# Altium PCB voltage.PcbDoc
Units mil, origin at the board's own origin, x right, y up, seen from the top; angles counter-clockwise.
Board outline 2497.45 x 842.52 mil, 2 copper layers (Top Layer, Bottom Layer); 37 components, 23 nets, 95 pads, 18 vias.
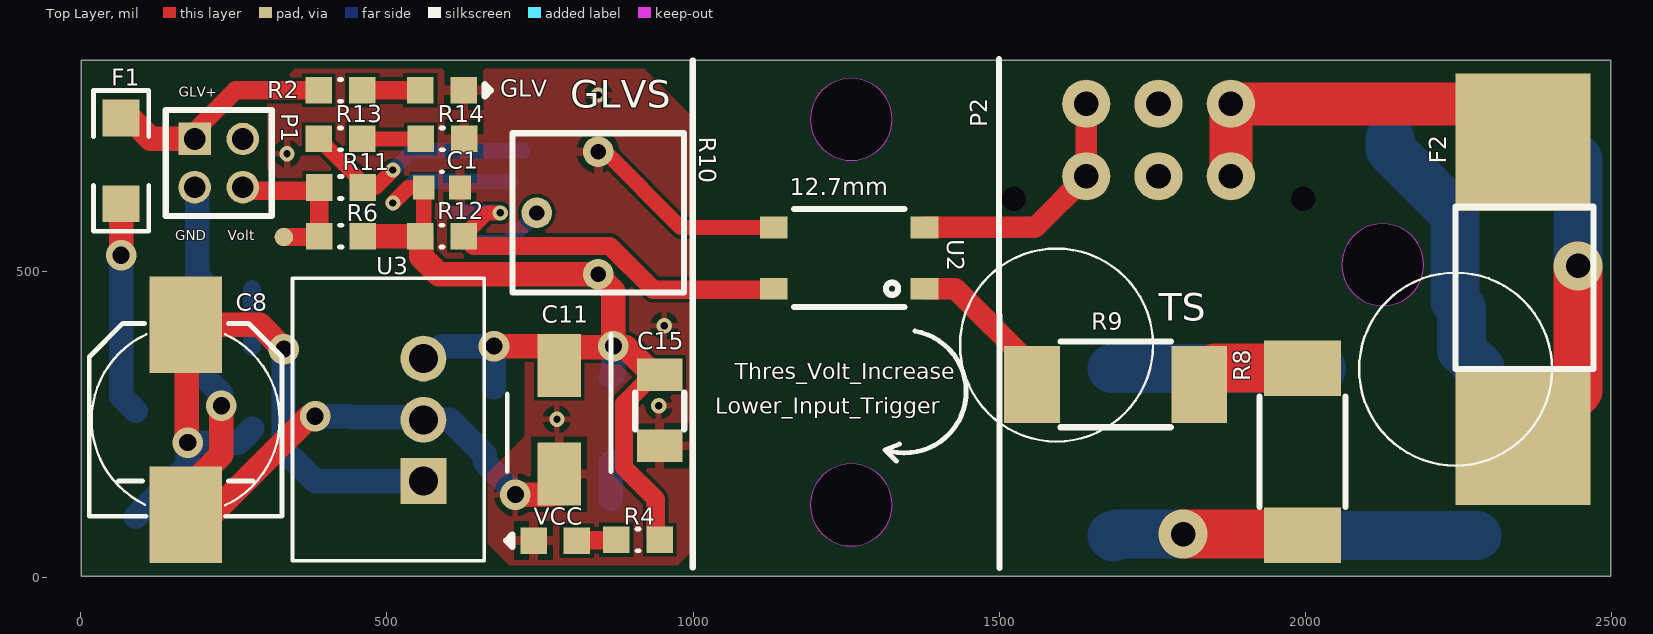
[diagram p0: Top Layer view]
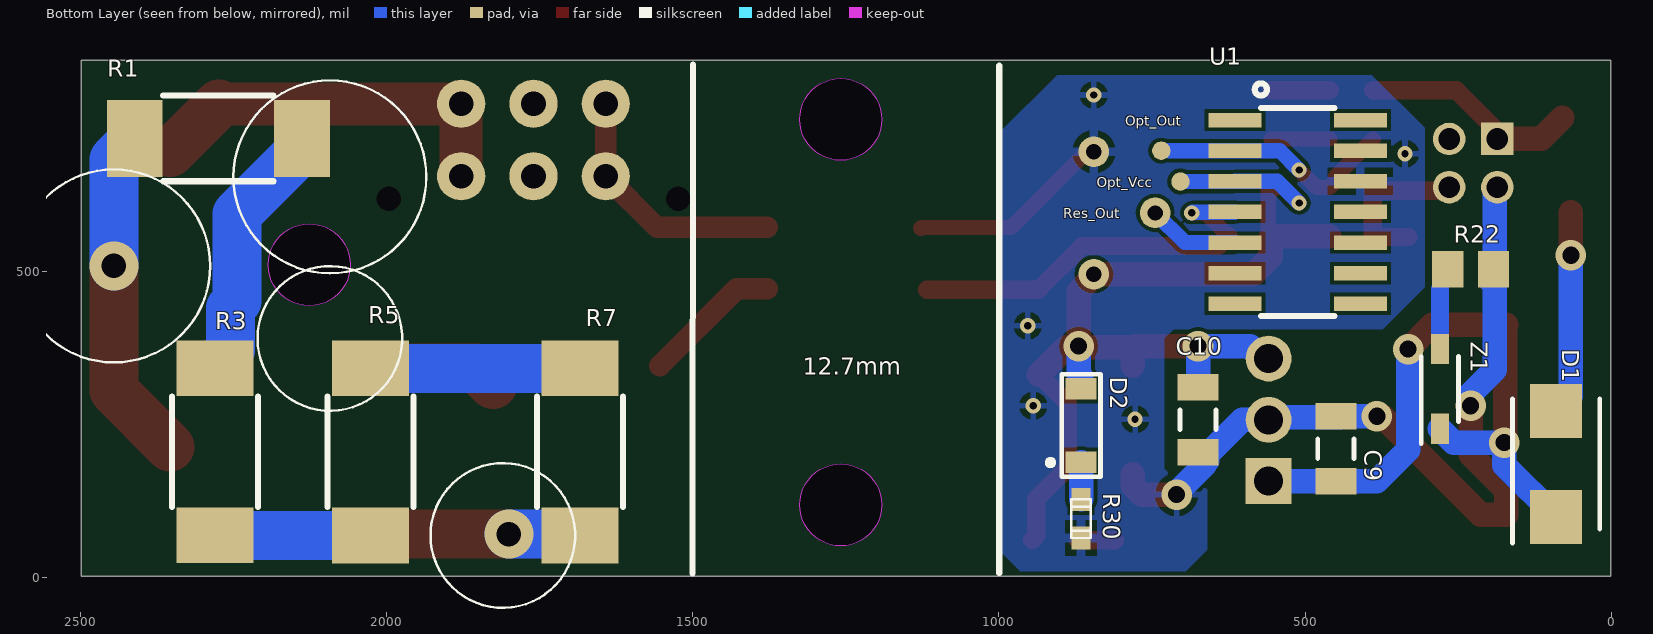
[diagram p1: Bottom Layer view, seen from below]
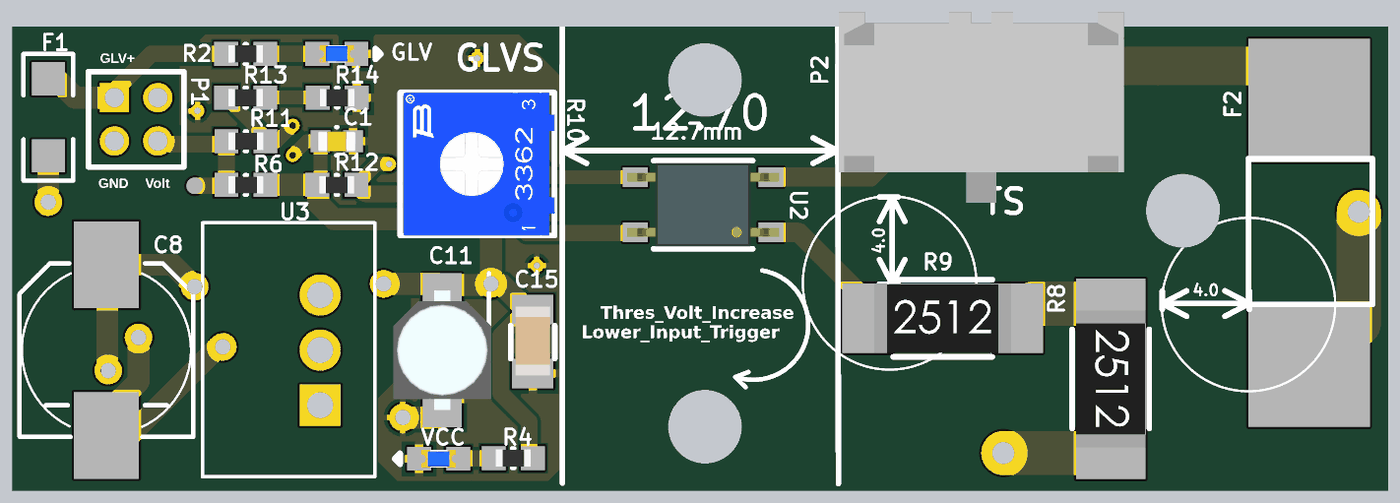
[diagram p2: 3D render of the assembled board from above, using the file's embedded part models]
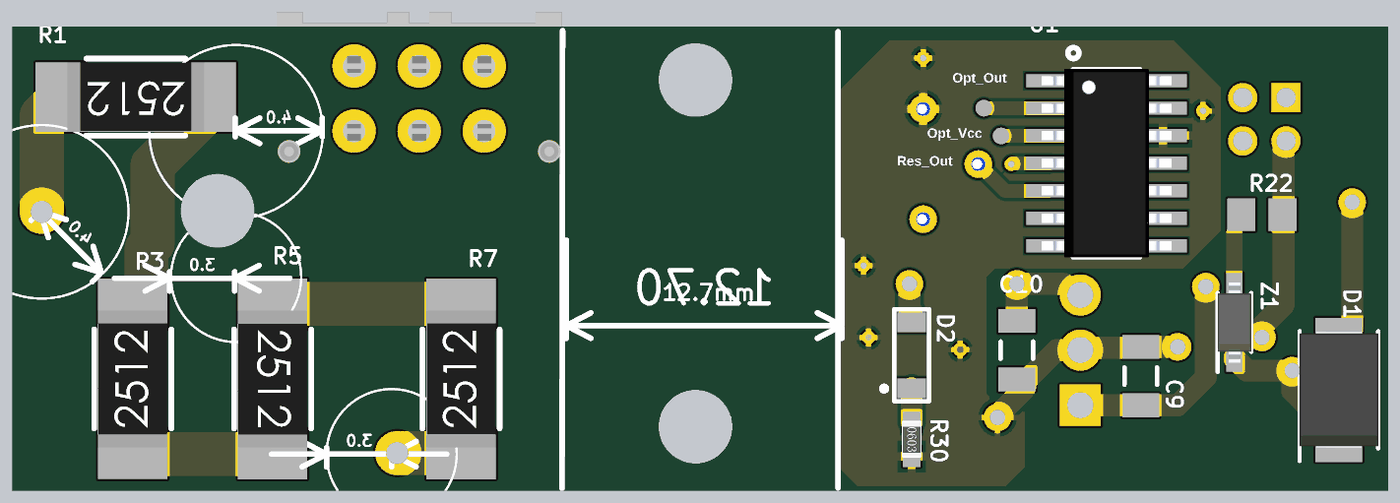
[diagram p3: 3D render of the assembled board from below, using the file's embedded part models]

## Layer stack, top to bottom
Top Solder: solder mask 0.4, Solder Resist, Dk 3.5
Top Layer: signal copper 1.4
Dielectric 1: dielectric 12.6, FR-4, Dk 4.8
Bottom Layer: signal copper 1.4
Bottom Solder: solder mask 0.4, Solder Resist, Dk 3.5

## Board outline
1.03,2.09 2498.48,2.09 2498.48,844.61 1.03,844.61
cut-out: 2059.06,510.22 ccw(c2125.98,510.22) 2125.98,443.29 ccw(c2125.98,510.22) 2192.91,510.22 ccw(c2125.98,510.22) 2125.98,577.15 ccw(c2125.98,510.22)
cut-out: 1191.47,118.16 ccw(c1258.4,118.16) 1258.4,51.23 ccw(c1258.4,118.16) 1325.33,118.16 ccw(c1258.4,118.16) 1258.4,185.09 ccw(c1258.4,118.16)
cut-out: 1191.47,747.67 ccw(c1258.4,747.67) 1258.4,680.75 ccw(c1258.4,747.67) 1325.33,747.67 ccw(c1258.4,747.67) 1258.4,814.6 ccw(c1258.4,747.67)

## Design rules (kind name [scope] priority, off if disabled: settings)
Clearance "Schematic Clearance Constraint_5" [InNet('BAT+')] p1: gap=157.48 ignorepadtopadclearanceinfootprint=TRUE
Clearance [All] p2: gap=6 ignorepadtopadclearanceinfootprint=TRUE
PlaneConnect [All] p1: planeconnectstyle=Relief reliefexpansion=20 reliefentries=4 reliefconductorwidth=15 reliefairgap=10
PolygonConnect PolygonConnect_3 [HasFootprint('QFN50P300X300X80-13N-D') And OnLayer('Top Layer') vs InNet('GLV+')] p1: connectstyle=Direct reliefconductorwidth=10 reliefentries=4 polygonreliefangle="90 Angle" airgapwidth=10
PolygonConnect PolygonConnect_2 [InNet('GLV-') vs HasFootprint('QFN50P300X300X80-13N-D') And OnLayer('Top Layer')] p2: connectstyle=Direct reliefconductorwidth=10 reliefentries=4 polygonreliefangle="90 Angle" airgapwidth=10
PolygonConnect PolygonConnect_1 [All vs InNet('NetCbst_2')] p3: thpad.connectstyle=Relief thpad.reliefconductorwidth=10 thpad.reliefentries=4 thpad.polygonreliefangle="90 Angle" thpad.airgapwidth=10 smdpad.connectstyle=Direct smdpad.reliefconductorwidth=10 smdpad.reliefentries=4 smdpad.polygonreliefangle="90 Angle" smdpad.airgapwidth=10 via.connectstyle=Relief via.reliefconductorwidth=10 via.reliefentries=4 via.polygonreliefangle="90 Angle" via.airgapwidth=10
PolygonConnect [All] p4: thpad.connectstyle=Relief thpad.reliefconductorwidth=15 thpad.reliefentries=4 thpad.polygonreliefangle="90 Angle" thpad.airgapwidth=10 smdpad.connectstyle=Relief smdpad.reliefconductorwidth=15 smdpad.reliefentries=4 smdpad.polygonreliefangle="90 Angle" smdpad.airgapwidth=10 via.connectstyle=Relief via.reliefconductorwidth=10 via.reliefentries=4 via.polygonreliefangle="90 Angle" via.airgapwidth=10
RoutingVias [All] p1: holewidth=12 width=25 viastyle="Through Hole" minholewidth=10 minwidth=20 maxholewidth=400 maxwidth=400
SolderMaskExpansion [All] p1: expansion=4
Width [All] p1: maxlimit=100 minlimit=6 preferedwidth=8
29 further rules are at their usual default settings.

## Classes and differential pairs
component class Voltage_60_Measure: C1 C8 C9 C10 C11 C15 D1 D2 F1 F2 GLV P1 P2 R1 R2 R3 R4 R5 R6 R7 R8 R9 R10 R11 R12 R13 R14 R22 R30 U1 U2 U3 VCC Z1

## Components (designator, comment, footprint, x,y, rotation, side; value= is the part's Value field where it differs from the comment)
C1 "VJ0603Y104KXAAC" C0603 590,636.48 r180 top value=0.1uF
C8 "EEE-FK1H101P" C-RB-SD8 171.66,257.21 r270 top value=100uF
C9 "Cap Semi" C1206#1 450,210 r270 bottom value=100nF
C10 "Cap Semi" C1206#1 675,257.21 r90 bottom value=100nF
C11 "EEE-FK1H100SR" CAPAE430X610N 781.41,257.21 r270 top
C15 "VJ1206A102JXGAT5Z" C1206#2 945.67,271.77 r270 top value=10NF
D1 "MBRS140T3G" DIOM5436X247N 90.36,185.16 r90 bottom
D2 "Tranzorb" SOD123 865.94,247.85 r90 bottom
F1 "Fuse 1206 500mA" 1206 66.19,680 r270 top
F2 "0485500.DR" 0485500DR 2355,470.1 r90 top value=1A
GLV "VLMB1310-GS08" "BlueLED 0603" 590,795 r0 top
P1 "Header 2X2" PHB2*2 186.26,715.74 r0 top
P2 "Header 3X2A" 43045-0612 1878.11,773.11 r180 top
R1 "PHP02512E2001BST5" R2512 2274.53,716.65 r0 bottom value=12k
R2 "CRCW060320K0FKEAC" R0603 424.57,795 r180 top value=20k
R3 "PHP02512E2001BST5" R2512 2280,205 r90 bottom value=12k
R4 "CRCW06035K10JNEAC" R0603 910.28,61.11 r0 top value=5.1k
R5 "PHP02512E2001BST5" R2512 2026.11,204.84 r270 bottom value=12k
R6 "CRCW06031K50FKEAC" R0603 425,557.23 r0 top value=3k
R7 "PHP02512E2001BST5" R2512 1683.98,204.84 r90 bottom value=12k
R8 "PHP02512E2001BST5" R2512 1995,205 r270 top value=12k
R9 "PHP02512E2001BST5" R2512 1690,315 r0 top value=12k
R10 "3362P-1-502LF" 3362p 745,595 r270 top value=5k
R11 "CRCW06031K00JNEAC" R0603 425,636.48 r180 top value=1k
R12 "CRCW06032K20JNEAC" R0603 590,557.23 r180 top value=2.2k
R13 "CRCW06031K50FKEAC" R0603 424.57,715.74 r180 top value=1.5k
R14 "CRCW06031K00JNEAC" R0603 590.7,715.74 r180 top value=1.5k
R22 "Res3" 0805-2 230,503.09 r0 bottom value=5.1K
R30 "R" "R 0603" 865.95,95.75 r270 bottom value=75R
TP1 "TP" TP 331.99,555.57 r90 top
TP2 "TP" TP 734.96,696.57 r90 bottom
TP3 "TP" TP 703.67,646.14 r90 bottom
U1 "TSX3704IDT" SO-14 512.36,596.57 r180 bottom
U2 "tlp183" SOP-4 1254.96,521.22 r180 top
U3 "K7805-500" K7805-500R3 631.98,526.74 r90 top
VCC "VLMB1310-GS08" "BlueLED 0603" 775,60 r180 top
Z1 "MMSZ5257BT1G" SOD3716X135N 280,307.56 r90 bottom

## Footprints (in the part's own frame and the unit in brackets; to place one, negate y for a bottom-side part, rotate by r counter-clockwise, add the part's x,y. Pads: shape width x height; smd on the part's side, far side on the other; paste and mask are expansions set on the pad)
0805-2 [mm] "0805无丝印"
  rect 1.3x1.5 smd: 1(-0.95,0) 2(0.95,0)
1206 [mil]
  rect 60x60 smd: 1(-70,0) 2(70,0)
  silkscreen extent -115,-45 115,45, body extent -75,-35 75,35, height 39
3362p [mil]
  round 50 hole 25: 1(-100,100) 2(0,0) 3(100,100)
  silkscreen extent -130,-40 130,240, body extent -130,-34 130,241, height 185
43045-0612 [mm] "Micro-Fit 3.0 Vertical Header, 3.00mm Pitch, Dual Row, 6 Circuits, with PCB Polarizing Peg, Tin, Glow-Wire Capable, Black"
  round 2 hole 1.02: 1(6,0) 2(3,0) 3(0,0) 4(6,3) 5(3,3) 6(0,3)
  round 0 hole 1.02: 14(9,3.94) 15(-3,3.94)
  body extent -3.57,-2.47 9.58,6.3, height 9.95
0485500DR [mm]
  rect 5.7x5.6 smd: 1(-6.1,0) 2(6.1,0)
  silkscreen extent -3.3,-2.92 3.43,2.79, body extent -6.35,-4.32 6.3,2.86, height 4.5
"BlueLED 0603" [mm]
  rect 1.1x1.1 smd: A(-0.9,0) C(0.9,0)
  silkscreen extent 1.78,-0.25 2.03,0.25, body extent -0.8,-0.4 0.8,0.4, height 0.6
C0603 [mm]
  rect 0.9x1 smd: 1(-0.75,0) 2(0.75,0)
  silkscreen extent -0.03,-0.65 0.03,0.65, body extent -0.89,-0.47 0.88,0.48, height 0.93
C1206#1 [mm] "Chip Capacitor, Body 3.2x1.6mm, IPC High Density"
  rect 1.1x1.7 smd: 1(-1.35,0) 2(1.35,0)
  silkscreen extent -0.4,-0.75 0.4,0.75, body extent -1.7,-0.9 1.7,0.9, height 1.3
C1206#2 [mm]
  rect 1.35x1.9 smd: 1(-1.5,0) 2(1.45,0)
  silkscreen extent -0.76,-1.02 0.76,1.02, body extent -1.65,-0.8 1.55,0.8, height 0.79
C-RB-SD8 [mm] "贴片铝电解"
  rect 4x3 smd: 1(-3.937,0) 2(3.937,0)
  silkscreen extent -4,-4 4,4, body extent -3.95,-3.99 4.02,3.99, height 8
CAPAE430X610N [mm]
  rect 2.6x1.8 smd: 1(-2.25,0) 2(2.25,0)
  silkscreen extent -3.55,-2.15 2.15,2.15, body extent -2.75,-2.25 2.75,2.25, height 6.1
DIOM5436X247N [mm]
  rect 2.25x2.15 smd: 1(-2.2,0) 2(2.2,0)
  silkscreen extent -3.27,-1.81 2.7,1.81, body extent -2.7,-1.81 2.7,1.81, height 2.47
K7805-500R3 [mm]
  rect 1.9x1.9 hole 1.2: 1(-9.386,1.835)
  round 1.9 hole 1.2: 2(-6.846,1.835) 3(-4.306,1.835)
  silkscreen extent -12.69,-0.69 -0.98,7.26, body extent -12.65,-0.65 -0.98,7.24, height 10.16
PHB2*2 [mm]
  rect 1.35x1.35 hole 0.9: 1(0,0)
  round 1.35 hole 0.9: 2(2,0) 3(0,-2) 4(2,-2)
  silkscreen extent -1.2,-3.2 3.2,1.2, body extent -1.02,-3.05 3.05,1.02, height 6
R0603 [mm]
  rect 1.1x1.1 smd: 1(-0.9,0) 2(0.9,0)
  silkscreen extent -0.05,-0.45 0.05,0.45, body extent -0.8,-0.4 0.8,0.4, height 0.4
R2512 [mil]
  rect 91x126 smd: 1(-136.5,0) 2(136.5,0)
  silkscreen extent -90,-70 90,70, body extent -124,-63 124,63, height 24
"R 0603" [mm]
  rect 0.965x0.8 smd: 1(-0.8,0) 2(0.8,0)
  silkscreen extent -0.8,-0.4 0.8,0.4, body extent -0.77,-0.4 0.83,0.4, height 0.45
SO-14 [mm]
  rect 2.2x0.6 smd: 1(-2.6,3.81) 2(-2.6,2.54) 3(-2.6,1.27) 4(-2.6,0) 5(-2.6,-1.27) 6(-2.6,-2.54) 7(-2.6,-3.81) 8(2.6,-3.81) 9(2.6,-2.54) 10(2.6,-1.27) 11(2.6,0) 12(2.6,1.27) 13(2.6,2.54) 14(2.6,3.81)
  silkscreen extent -1.78,-4.32 1.52,5.33, body extent -2.99,-4.34 3,4.35, height 1.6
SOD123 [mm] "2.7mm X 1.6mm diode"
  rect 0.9x1.3 smd: 1(-1.525,0) 2(1.525,0)
  silkscreen extent -2.12,-0.8 2.13,1.38
SOD3716X135N [mm]
  rect 1.25x0.75 smd: 1(-1.65,0) 2(1.65,0)
  silkscreen extent -2.28,-0.77 1.35,0.77, body extent -1.85,-0.78 1.85,0.77, height 1.35
SOP-4 [mm]
  rect 1.15x0.9 smd: 1(-3.125,1.27) 2(-3.125,-1.27) 3(3.125,-1.27) 4(3.125,1.27)
  silkscreen extent -2.29,-2.03 2.29,2.03, body extent -3.5,-1.92 3.5,1.93, height 2.1
TP [mil]
  round 30 smd: 0(0,0)

## Part data
C1: "多层陶瓷电容器MLCC - SMD/SMT 0603 .1uF 50volts X7R 10%", Manufacturer=Vishay, Voltage=50V, ComponentLink1Description=Datasheet, ComponentLink1URL=https://eu.mouser.com/datasheet/2/427/vjcommercialseries-222796.pdf, Weight=0.002
C8: library part "Cap Pol1", "Polarized Capacitor (Radial)", LatestRevisionDate=17-Jul-2002, LatestRevisionNote="Re-released for DXP Platform.", PackageDescription="Polarized Capacitor (Radial); 2 Leads", PackageReference=RB7.6-15, Published=8-Jun-2000, Publisher="Altium Limited"
C9 C10: "Capacitor (Semiconductor SIM Model)", LatestRevisionDate=29-May-2009, LatestRevisionNote="IPC-7351 Footprint Added.", PackageDescription="Chip Capacitor", PackageReference=C1206, Published=8-Jun-2000, Publisher="Altium Limited"
C11: "Capacitor Polarised", Manufacturer_Name=Panasonic, Mouser Part Number=667-EEE-FK1H100SR, Datasheet Link=https://industrial.panasonic.com/cdbs/www-data/pdf/RDE0000/ABA0000C1251.pdf, Height=6.1mm, Manufacturer_Part_Number=EEE-FK1H100SR, Mouser Price/Stock=https://www.mouser.com/Search/Refine.aspx?Keyword=667-EEE-FK1H100SR
C15: "多层陶瓷电容器MLCC - SMD/SMT 1206 1000pF 1KV C0G 5%", Manufacturer=Vishay, Voltage=1000V, ComponentLink1Description=Datasheet, ComponentLink1URL=https://eu.mouser.com/datasheet/2/427/vjcommercialseries-222796.pdf, Weight=0.0162
D1: "Diode", Manufacturer_Name="ON Semiconductor", Mouser Part Number=863-MBRS140T3G, RS Part Number=5452074P, Allied_Number=70099505, Allied Price/Stock=http://www.alliedelec.com/on-semiconductor-mbrs140t3g/70099505/, Datasheet Link=http://www.onsemi.com/pub/Collateral/MBRS140T3-D.PDF, Height=2.47mm, Manufacturer_Part_Number=MBRS140T3G, Mouser Price/Stock=https://www.mouser.com/Search/Refine.aspx?Keyword=863-MBRS140T3G, RS Price/Stock=http://uk.rs-online.com/web/p/products/5452074P
D2: "Transient Voltage Suppression (TVS) Diode", LatestRevisionDate=17-Jul-2002, LatestRevisionNote="Re-released for DXP Platform.", PackageDescription="Axial Lead Diode", PackageReference=DO-7, Published=24-Mar-1999, Publisher="Altium Limited"
F1: library part "Fuse 2", "littelfuse 0437 .500", LatestRevisionDate=17-Jul-2002, LatestRevisionNote="Re-released for DXP Platform.", PackageDescription="Thru-Hole; 2 Leads", PackageReference=PIN-W2/E2.8, Published=8-Jun-2000, Publisher="Altium Limited"
F2: "Fast-Acting 485 Series", Manufacturer=Littefuse, ComponentLink1Description=Datasheet, ComponentLink1URL=https://datasheet.octopart.com/0485.500DR-Littelfuse-datasheet-21204217.pdf
GLV VCC: "标准LED-SMD Blue Clear Non-Diff", Color=Blue, Manufacturer=Vishay, ComponentLink1Description=Datasheet, ComponentLink1URL=https://www.mouser.cn/datasheet/2/427/vlmo1300-241412.pdf
P1: "Header, 2-Pin, Dual row", LatestRevisionDate=17-Jul-2002, LatestRevisionNote="Re-released for DXP Platform.", Publisher="Altium Limited"
P2: "Header, 3-Pin, Dual row", LatestRevisionDate=17-Jul-2002, LatestRevisionNote="Re-released for DXP Platform.", Publisher="Altium Limited"
R1 R3 R5 R7 R8 R9: "Thin Film Resistors - SMD 2.5watt 2Kohms .1% 25 PPM", Manufacturer=Vishay, Power=2.5W, Voltage=200V, ComponentLink1Description=Datasheet, ComponentLink1URL=https://eu.mouser.com/datasheet/2/427/php-73510.pdf, Weight=0.00405
R2: "Thick Film Resistors - SMD 1/10Watt 20Kohms 1% Commercial Use", Manufacturer=Vishay, Voltage=75V, ComponentLink1Description=Datasheet, ComponentLink1URL=https://eu.mouser.com/datasheet/2/427/crcwce3-1223726.pdf
R4: "Thick Film Resistors - SMD 1/10Watt 5.1Kohms 1% Commercial Use", Manufacturer=Vishay, ComponentLink1Description=Datasheet, ComponentLink1URL=https://eu.mouser.com/datasheet/2/427/crcwce3-1223726.pdf
R6 R13: "Thick Film Resistors - SMD 1/10Watt 1.5Kohms 1% Commercial Use", Manufacturer=Vishay, ComponentLink1Description=Datasheet, ComponentLink1URL=https://eu.mouser.com/datasheet/2/427/crcwce3-1223726.pdf
R10: "Trimmer Resistors - Through Hole 1/4\"SQ 5KOHMS 10% 0.5WATTS", Manufacturer=Bourns, ComponentLink1Description=Datasheet, ComponentLink1URL=https://eu.mouser.com/datasheet/2/54/362-776956.pdf, Weight=0.567
R11 R14: "Thick Film Resistors - SMD 1/10Watt 1Kohms 5% Commercial Use", Manufacturer=Vishay, Power=0.1W, Voltage=75V, ComponentLink1Description=Datasheet, ComponentLink1URL=https://eu.mouser.com/datasheet/2/427/crcwce3-1223726.pdf
R12: "Thick Film Resistors - SMD 1/10Watt 2.2Kohms 1% Commercial Use", Manufacturer=Vishay, Voltage=75V, ComponentLink1Description=Datasheet, ComponentLink1URL=https://eu.mouser.com/datasheet/2/427/crcwce3-1223726.pdf
R22: "Resistor", LatestRevisionDate=29-May-2009, LatestRevisionNote="IPC-7351 Footprint Added.", PackageDescription="Chip Resistor", PackageReference=J1-0603, Published=8-Jun-2000, Publisher="Altium Limited"
U1: "Analog Comparators Micropower (5uA) 16V quad CMOS comparator, push pull output", Manufacturer=ST, ComponentLink1Description=Datasheet, ComponentLink1URL=https://eu.mouser.com/datasheet/2/389/tsx3704-957487.pdf, Weight=0.2592
U2: library part VOMA617A-X001T, "Transistor Output Optocouplers 80V Vceo; 3750 Vrms SOP-4; 50-600 CTR", ComponentLink1Description=Datasheet, ComponentLink1URL=https://eu.mouser.com/datasheet/2/427/voma617a-1314950.pdf
Z1: "Zener Diode", Manufacturer_Name="ON Semiconductor", Mouser Part Number=863-MMSZ5257BT1G, RS Part Number=6547482, Datasheet Link=http://www.onsemi.com/pub/Collateral/MMSZ5221BT1-D.PDF, Height=1.35mm, Manufacturer_Part_Number=MMSZ5257BT1G, Mouser Price/Stock=https://www.mouser.com/Search/Refine.aspx?Keyword=863-MMSZ5257BT1G, RS Price/Stock=http://uk.rs-online.com/web/p/products/6547482

## Via types
v1: diameter 50, hole 28, Top Layer to Bottom Layer, 8 vias
v2: diameter 25, hole 12, Top Layer to Bottom Layer, 8 vias
v3: diameter 80, hole 40, Top Layer to Bottom Layer, 2 vias

## Nets (pads, with @x,y where several pads share a name; then routed paths per layer and width w, separated by ;. In a path a pad name is that pad's centre, name@x,y a point inside that pad or via, vN(x,y) a via of type N, cw(c..) or ccw(c..) an arc to the next point about the centre after c; other vN are vias at no path point)
GLV+: F1.1 P1.1 R2.2 | length 356.2
  Top Layer w30: P1.1@173.74,715.74 253,795 R2.2
  Top Layer w40: F1.1@80,750 114.26,715.74 P1.1@173.74,715.74
GND: C1.1 C8.2 C9.1 C10.1 C11.2 C15.2 GLV.C P1.3 R10.1 R14.1 R22.1 R30.2 U1.12 U2.3 U3.2 VCC.C | length 1665.8
  Top Layer w25: R10.1 855.91,695 979.87,571.03 1126.64,571.03 U2.3@1127.87,569.8
  Top Layer w40: v1(230,280.21) 230,200.23 171.66,141.89 C8.2 213.49,102.21 374.39,263.11 v1(382.99,263.11) ; v1(710,135) 766.54,135 781.41,149.86 C11.2
  Bottom Layer w40: R22.1@190.72,488.51 190.72,503.09 P1.3@190.72,631.26 ; R22.1@197.6,485.36 190.72,478.48 190.72,339.28 230,300 v1(230,280.21) ; v1(382.99,263.11) 439.88,263.11 441.54,261.46 555.49,261.46 U3.2 602.79,257.21 660,200 660,190 664.09,183.67 v1@711.38,136.38
  other v2: 777.78,258.11 944.12,280.21 953.17,410.54 336.99,691.74 845,787.5
HV+: F2.2 P2.3 P2.6 | length 626.3
  Top Layer w70: P2.6 P2.3 F2.2@2273.44,773.11
  Top Layer w80: F2.2@2273.44,773.11 F2.2@2353.27,693.28
HV-: P2.1 P2.4 U2.2 | length 416.7
  Top Layer w35: U2.2@1377.99,571.33 1558.22,571.33 P2.4 P2.1
NetC8_1: C8.1 C9.2 D1.1 U3.1 Z1.1 | length 1055.2
  Top Layer w40: v1(175,220) 173.33,221.67 173.33,410.54 C8.1 292.31,412.21 v1(331.99,372.52)
  Bottom Layer w40: D1.1 175,183.19 v1(175,220) 257.4,220 Z1.1 ; v1(331.99,372.52) 331.99,208.01 382.99,157.01 C9.2@440.08,157.01 ; C9.2@439.88,156.81 C9.2@440.08,157.01 ; C9.2 C9.2@449.84,157.01 ; U3.1 559.55,157.01 C9.2@449.84,157.01 ; C9.2@440.08,157.01 C9.2@449.84,157.01
NetD1_2: D1.2 F1.2 | length 334.4
  Top Layer w40: v1(66.19,525.95) F1.2@66.19,596.19
  Bottom Layer w40: v1(66.19,525.95) 66.19,295.94 D1.2
NetD2_1: D2.1 R30.1 | length 60.6
  Bottom Layer w40: R30.1 D2.1
NetF2_1: F2.1 R1.2 | length 556
  Top Layer w80: F2.1@2353.27,212.96 2445.24,304.93 v3(2445.24,508.39)
  Bottom Layer w80: R1.2 2445.24,682.44 v3(2445.24,508.39)
NetGLV_A: GLV.A R2.1 | length 94.6
  Top Layer w30: R2.1 GLV.A
NetR1_1: R1.1 R3.2 | length 436
  Bottom Layer w80: R1.1 2138.03,699.15 2244.09,593.09 2244.09,450.91 2255,440 2255,371.5 R3.2@2285,341.5
NetR3_1: R3.1 R5.2 | length 254
  Bottom Layer w80: R5.2 2026.18,68.42 2279.92,68.42 R3.1
NetR4_1: R4.1 VCC.A | length 64.9
  Top Layer w20: VCC.A VCC.A@810.99,60.55 ; R4.1@870.69,60.55 871.24,61.11 R4.1
  Top Layer w30: VCC.A@810.99,60.55 R4.1@870.69,60.55
NetR5_1: R5.1 R7.2 | length 342.1
  Bottom Layer w80: R7.2 R5.1
NetR7_1: R7.1 R8.2 | length 314
  Top Layer w80: v3(1800,70.35) R8.2@1995,70.35
  Bottom Layer w80: R7.1 1686.62,65.69 1691.28,70.35 v3(1800,70.35)
NetR8_1: R8.1 R9.2 | length 179.5
  Top Layer w80: R9.2 1853,341.5 R8.1
NetR9_1: R9.1 U2.1 | length 227.5
  Top Layer w35: U2.1@1377.99,471.33 1378.19,471.12 1428.17,471.12 R9.1@1553.5,345.79
NetR10_2: R10.2 U1.5 | length 150.3
  Bottom Layer w25: U1.5 696.57,546.57 R10.2
NetR11_1: R11.1 R13.2 TP2.0 U1.2 | length 395.7
  Top Layer w25: R13.2 451.28,653.6 451.28,645.64 R11.1 481.48,636.48 v2(510,665)
  Bottom Layer w25: v2(510,665) 541.57,696.57 U1.2 TP2.0@722.5,696.57
NetR12_1: R12.1 U1.4 U2.4 | length 673.9
  Top Layer w25: R12.1 663.21,595 v2(685,595)
  Top Layer w30: R12.1 641.66,541 864.05,541 935.25,469.8 U2.4@1116.97,469.8
  Bottom Layer w25: U1.4 615.41,595.89 684.11,595.89 v2(685,595)
NetR13_1: R13.1 R14.2 | length 95.3
  Top Layer w25: R13.1 R14.2
NetR22_2: R22.2 Z1.2 | length 92.6
  Bottom Layer w30: Z1.2@280,377.52 280,470.16
VCC: C1.2 C10.2 C11.1 C15.1 D2.2 R4.2 R6.2 R10.3 R12.2 TP3.0 U1.3 U3.3 | length 1762.8
  Top Layer w25: v2(510,611.26) 535.22,636.48 550,636.48 C1.2@556.22,630.26 ; R12.2@560.47,563.13 C1.2
  Top Layer w30: C15.1@934.84,330.83 887.27,283.25 887.27,179.41 939.05,127.62 939.05,67.76 R4.2
  Top Layer w40: R6.2 R12.2 556.22,555.57 556.22,523.78 585,495 R10.3 845,492.29 870,467.29 v1(870,377.52) ; v1(675,377.52) 776.41,377.52 781.41,372.52 C11.1 ; C11.1@781.41,375.48 781.53,375.61 868.09,375.61 v1(870,377.52) ; C15.1@934.84,330.83 890.06,375.61 871.91,375.61 v1(870,377.52)
  Bottom Layer w25: v2(510,611.26) 545.31,646.57 U1.3 615.16,646.14 TP3.0
  Bottom Layer w40: U3.3 569.16,357.21 589.48,377.52 v1(675,377.52) C10.2 ; 865.95,327.53 870,331.59 v1(870,377.52)
Volt: P1.4 R6.1 R11.2 TP1.0 | length 236.9
  Top Layer w30: P1.4@285,631.26 389.57,631.26 R6.1 387.91,555.57 TP1.0
pads on no net: P1.2 P2.2 P2.5 P2.14 P2.15 U1.1 U1.6 U1.7 U1.8 U1.9 U1.10 U1.11 U1.13 U1.14

## Polygon pours and split planes (outlines as drawn)
GND on Top Layer "Top Layer-GND" (solid, remove dead copper, pour order 0): 975,20 700,20 665,55 665,170 725,230 725,425 705,445 527.23,445 305,667.23 305,785 350,830 920,830 1000,750 1000,45
GND on Bottom Layer "Bottom Layer-GND" (solid, remove dead copper, pour order 2): 391.18,820 905,820 1000,725 1000,45 965,10 695,10 660,45 660,156.81 709.61,156.81 730,177.21 730,390 715,405 373.57,405 305,473.57 305,733.82

## Silkscreen, mask and mechanical layers (free items; w line width, h text height)
Top Overlay:
  circle w4: c1593.5,379.28 r157.48
  circle w4: c2245,340 r157.48
  lines w8: 1323.02,205.9 ccw(c1345.97,303.23) 1362.41,401.87 ; 1332.06,189.84 1313.18,208.33 1337.34,217.51
  lines w10: 999.59,15.98 999.59,843.98 ; 1499.59,845.98 1500.59,14.98
  text "GLV+" at 160,778.72 h28
  text "GLVS" at 799.73,766.31 h45
  text "12.7mm" at 1158.14,623.46 h28
  text "GND" at 155,545 h28
  text "Volt" at 240,545 h28
  text "TS" at 1760,419.32 h45
  text "Thres_Volt_Increase" at 1068.22,314.29 h45
  text "Lower_Input_Trigger" at 1035.94,257.82 h45
Bottom Overlay:
  circle w4: c2092.38,653.73 r157.48
  circle w4: c1810,68.34 r118.11
  circle w4: c2445.24,508.39 r157.48
  circle w4: c2092.38,390 r118.11
  lines w10: 999.59,7.33 999.59,835.33 ; 1499.59,837.33 1500.59,6.33
  text "Opt_Out" at 794,731.76 h28
  text "Opt_Vcc" at 840,631.26 h28
  text "Res_Out" at 895,580.81 h28
  text "12.7mm" at 1320,331.05 h28
Mechanical 1:
  circle w10: c2125.98,510.22 r66.93
  circle w10: c1258.4,118.16 r66.93
  circle w10: c1258.4,747.67 r66.93
  lines w5: 1.03,2.09 1.03,844.61 2498.48,844.61 2498.48,667.67 2498.48,2.09 2339.03,2.09 1.03,2.09

## Dimensions
1608.97,535.26 to 1598.22,377.15 on Top Overlay
2093.99,644.78 to 1935.88,655.54 on Bottom Overlay
1928.11,79.91 to 1810,68.34 on Bottom Overlay
2213.07,399.36 to 2094.96,387.79 on Bottom Overlay
2246.61,331.05 to 2088.5,341.8 on Top Overlay
992.73,456.77 to 1492.73,441.77 on Bottom Overlay
1498.97,774.43 to 998.97,759.43 on Top Overlay
2336.92,397.79 to 2448.28,509.15 on Bottom Overlay